# Altium PCB PCB1.PcbDoc
Units mm, origin at the board's own origin, x right, y up, seen from the top; angles counter-clockwise.
Board outline 26.8 x 45.34 mm, 2 copper layers (Top Layer, Bottom Layer), stack 1.569 mm thick; 32 components, 36 nets, 158 pads, 95 vias.
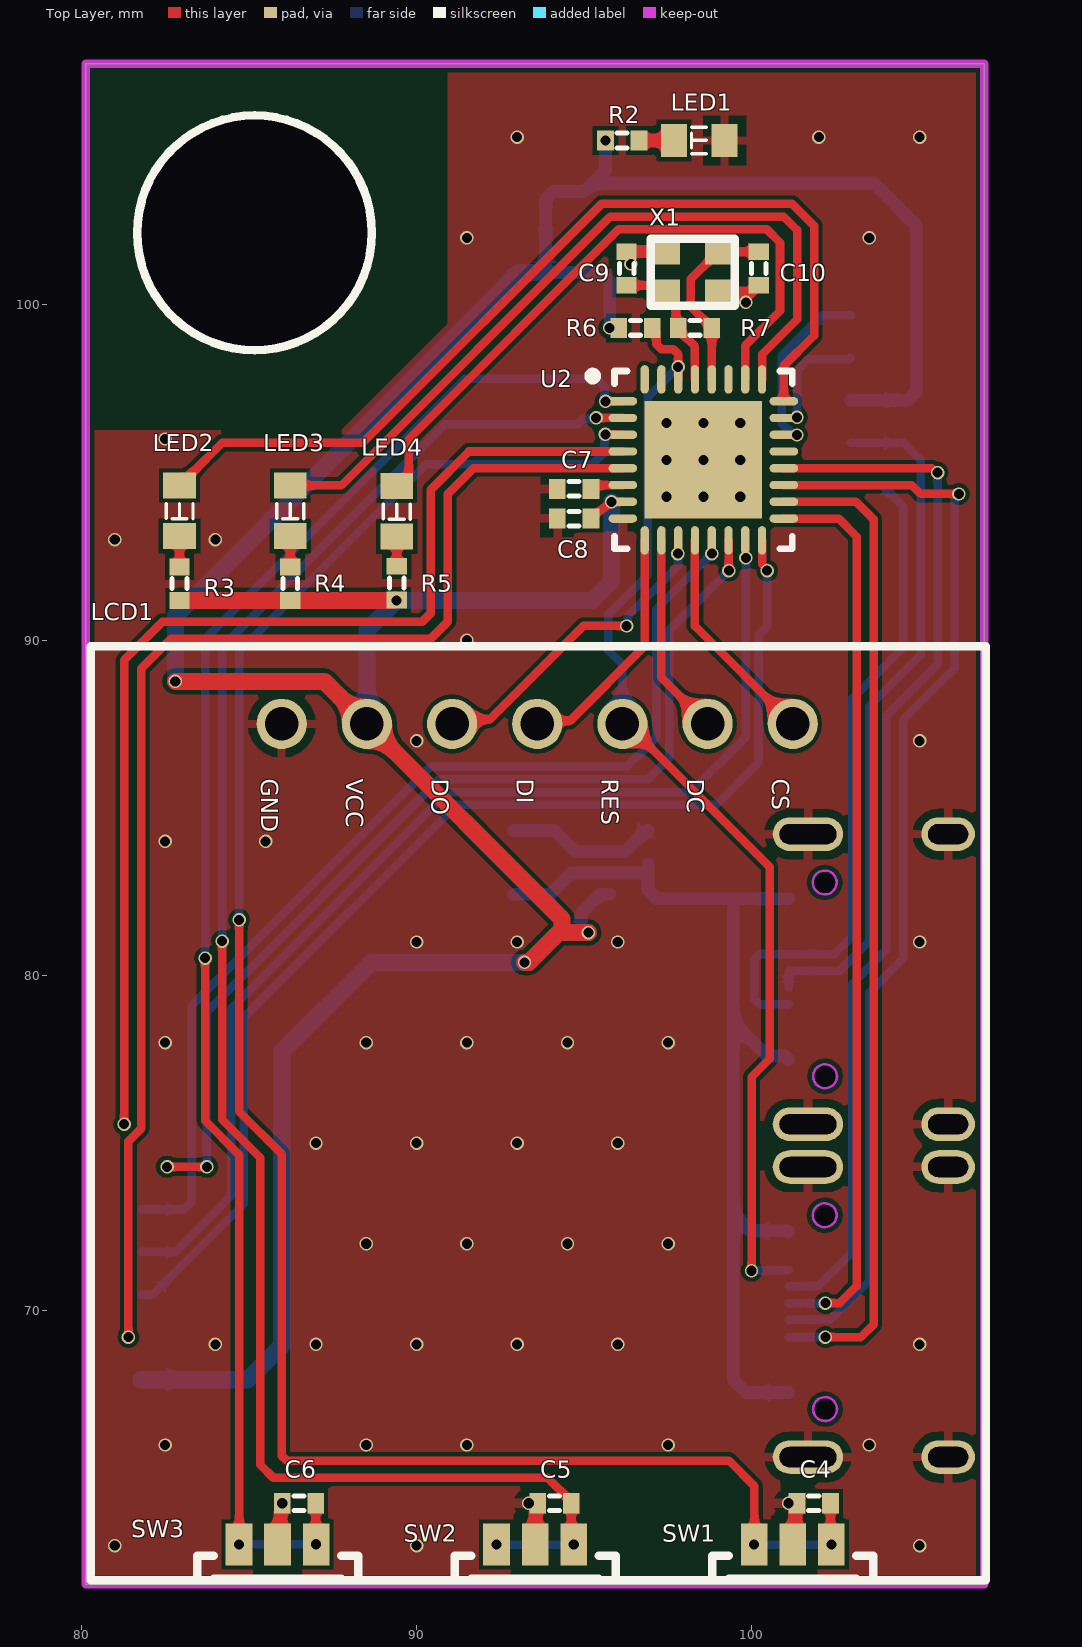
[diagram p0: Top Layer view]
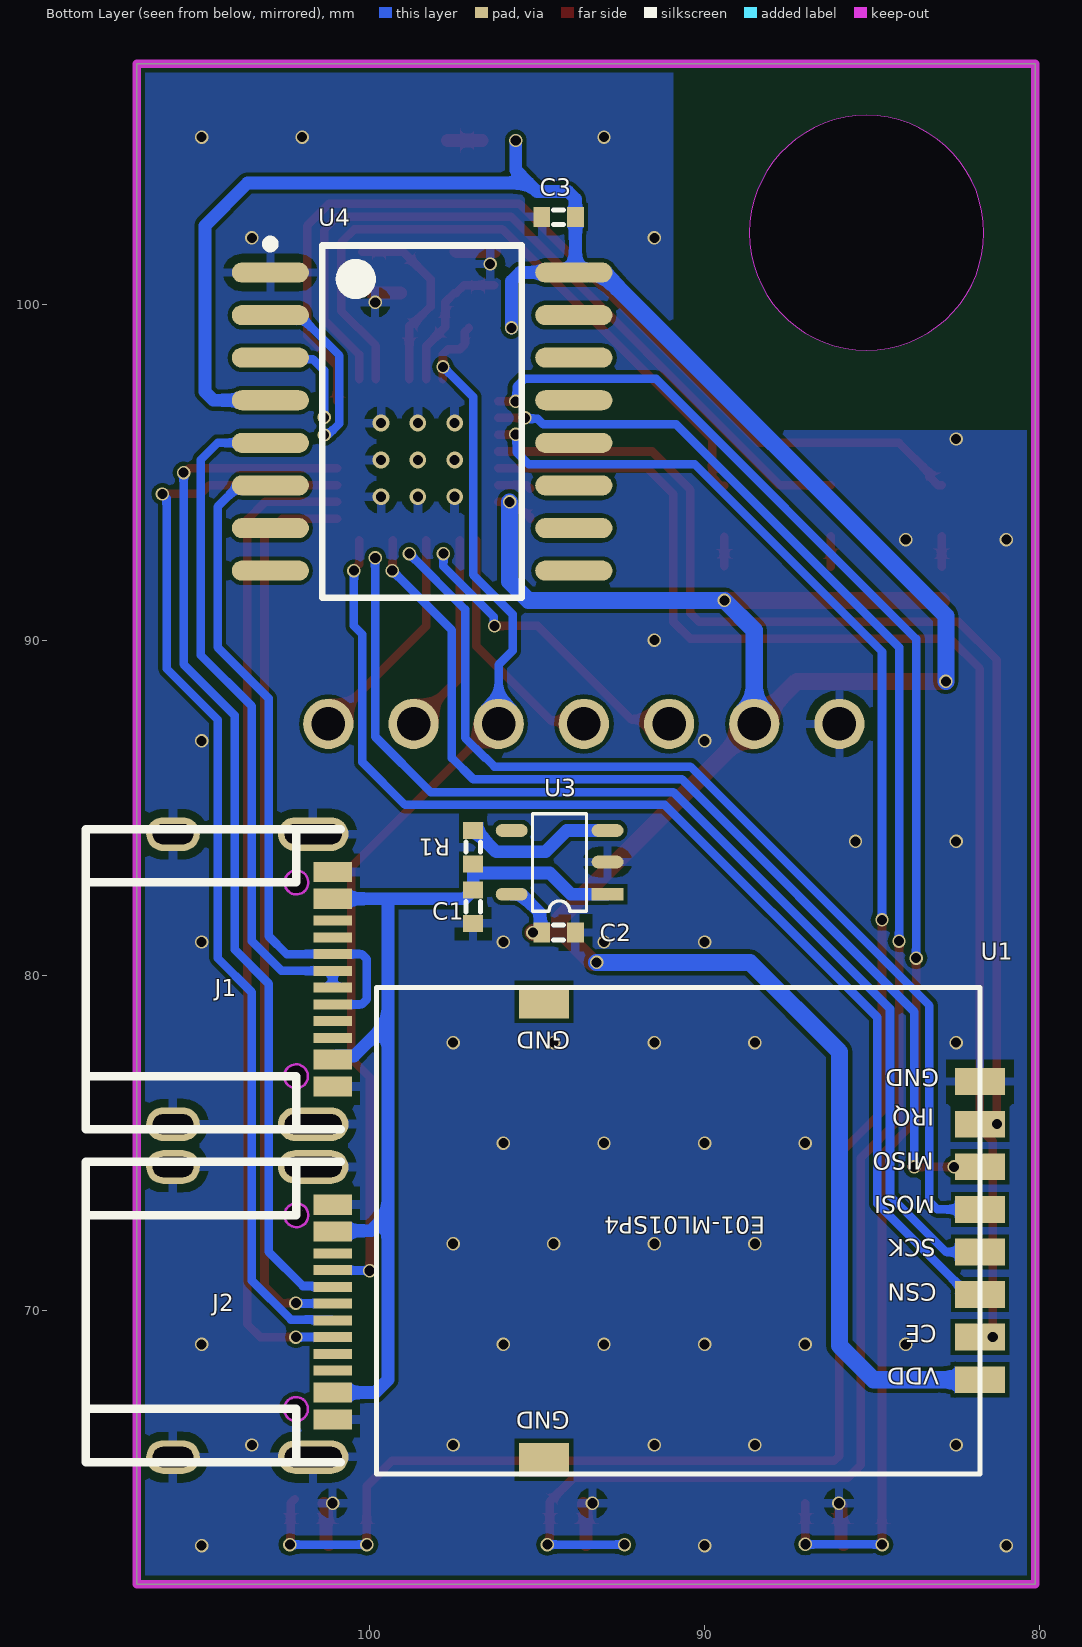
[diagram p1: Bottom Layer view, seen from below]
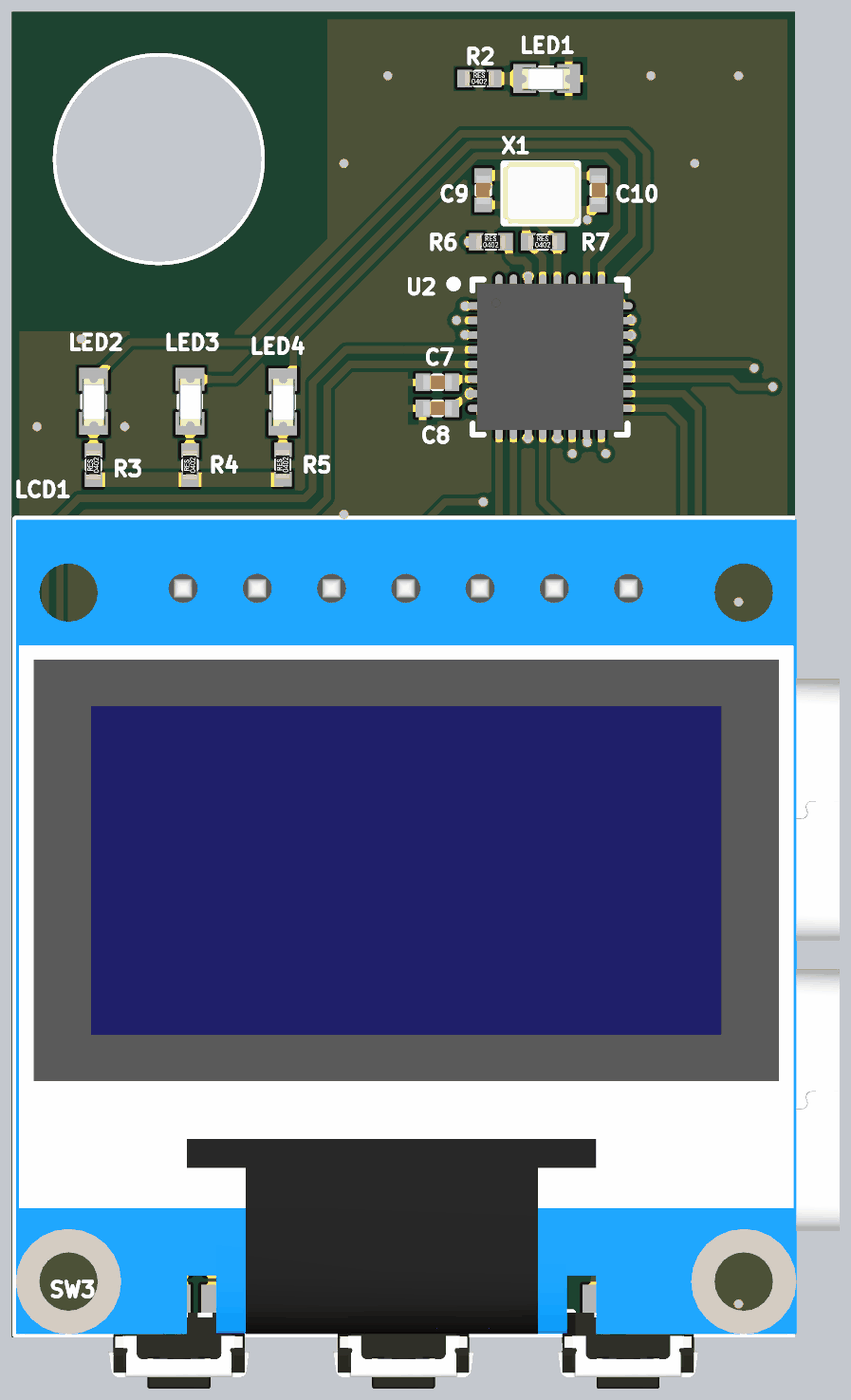
[diagram p2: 3D render of the assembled board from above, using the file's embedded part models]
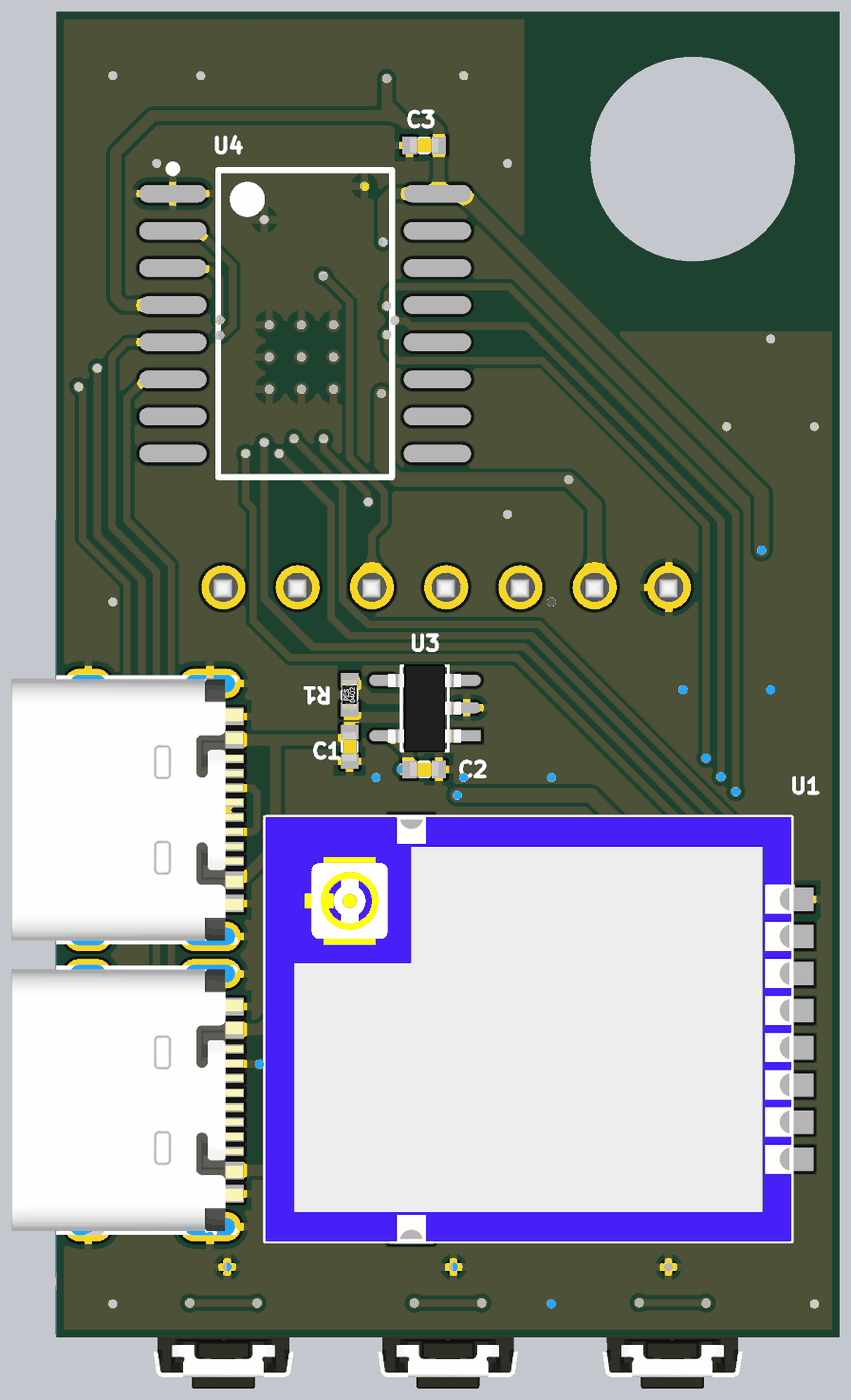
[diagram p3: 3D render of the assembled board from below, using the file's embedded part models]

## Layer stack, top to bottom
Top Solder: solder mask 0.0254, SM-001, Dk 4
Top Layer: signal copper 0.035
Dielectric 1: core 1.4986, Core-043, Dk 4.3
Bottom Layer: signal copper 0.035
Bottom Solder: solder mask 0.0254, SM-001, Dk 4

## Board outline
80.137,89.789 80.137,107.188 106.934,107.188 106.934,61.849 80.137,61.849
cut-out: 85.168,98.649 cw(c85.168,102.149) 81.668,102.149 cw(c85.168,102.149) 85.168,105.649 cw(c85.168,102.149) 88.668,102.149 cw(c85.168,102.149)

## Design rules (kind name [scope] priority, off if disabled: settings)
Clearance [All] p1: gap=0.127 ignorepadtopadclearanceinfootprint=FALSE
PolygonConnect [All] p1: connectstyle=Relief reliefconductorwidth=0.254 reliefentries=4 polygonreliefangle="90 Angle" airgapwidth=0.254
RoutingVias [All] p1: holewidth=0.711 width=1.27 viastyle="Through Hole" minholewidth=0.3 minwidth=0.4 maxholewidth=0.711 maxwidth=1.27
SolderMaskExpansion [All] p1: expansion=0.102 istentingtop=FALSE
Width [All] p1: maxlimit=0.508 minlimit=0.127 preferedwidth=0.254
30 further rules are at their usual default settings.

## Components (designator, comment, footprint, x,y, rotation, side; value= is the part's Value field where it differs from the comment)
C1 "Cap" CAP_0402 96.901,82.55 r270 bottom value=1uF
C2 "Cap" CAP_0402 94.853,81.28 r180 bottom value=1uF
C3 "Cap" CAP_0402 93.853,102.616 r0 bottom value=0.1uF
C4 "Cap" CAP_0402 102.346,64.262 r180 top value=0.1uF
C5 "Cap" CAP_0402 94.615,64.262 r180 top value=0.1uF
C6 "Cap" CAP_0402 86.995,64.262 r180 top value=0.1uF
C7 "Cap" CAP_0402 95.198,94.514 r180 top value=0.1uF
C8 "Cap" CAP_0402 95.198,93.625 r180 top value=0.1uF
C9 "Cap" CAP_0402 96.266,100.584 r90 top value=20pf
C10 "Cap" CAP_0402 100.203,101.584 r270 top value=20pf
J1 "USB TYPE C" USBC-SMD16F 105.852,84.215 r270 bottom
J2 "USB TYPE C" USBC-SMD16F 105.852,74.29 r270 bottom
LCD1 "LCD096" LCD096 85.979,87.503 r0 top
LED1 "R" SMD-0603_LED 97.677,104.902 r0 top
LED2 "R" SMD-0603_LED 82.931,93.105 r90 top
LED3 "R" SMD-0603_LED 86.233,93.105 r90 top
LED4 "R" SMD-0603_LED 89.408,93.091 r90 top
R1 "Res" RES_0402 96.901,83.328 r90 bottom value=10K
R2 "Res" RES_0402 95.631,104.902 r0 top value=1K
R3 "Res" RES_0402 82.931,91.186 r90 top value=1K
R4 "Res" RES_0402 86.233,91.186 r90 top value=1K
R5 "Res" RES_0402 89.408,91.202 r90 top value=1K
R6 "Res" RES_0402 96.028,99.314 r0 top value=10K
R7 "Res" RES_0402 97.806,99.314 r0 top value=1M
SW1 "SPST" ST01-111 102.369,63.028 r180 top
SW2 "SPST" ST01-111 94.688,63.028 r180 top
SW3 "SPST" ST01-111 87.007,63.028 r180 top
U1 "NRF24L01" NRF24L01P+PA+LNA+IPX 99.788,65.14 r90 bottom
U2 "NANO103ZD3AE" MCU_QFN_33_5x5 98.552,95.377 r0 top
U3 "AP2112K-3.3TRG1" SOT23-5 93.523,81.915 r0 bottom
U4 "CH340C" SOP-16 98.425,96.52 r180 bottom
X1 "Xtal" 2520S 99.059,100.35 r180 top value=12MHz

## Footprints (in the part's own frame and the unit in brackets; to place one, negate y for a bottom-side part, rotate by r counter-clockwise, add the part's x,y. Pads: shape width x height; smd on the part's side, far side on the other; paste and mask are expansions set on the pad)
2520S [mm]
  rect 0.9x0.8 smd: 1(0,-1.25) 2(1.65,0) ""(0,0) ""(1.65,-1.25)
  silkscreen extent -0.43,-1.63 2.07,0.37, body extent -0.49,-1.69 2.11,0.41, height 0.55
CAP_0402 [mm]
  rect 0.5x0.6 smd: 1(0,0) 2(1,0)
  silkscreen extent 0.35,-0.22 0.65,0.22, body extent 0,-0.25 1,0.25, height 0.48
LCD096 [mm]
  round 1.5 hole 1: 1(0,0) 2(2.54,0) 3(5.08,0) 4(7.62,0) 5(10.16,0) 6(12.7,0) 7(15.24,0)
  silkscreen extent -5.7,-25.54 21,2.32, body extent -5.7,-25.54 21,2.32, height 5.17
MCU_QFN_33_5x5 [mm]
  oval 0.85x0.25 smd: 1(-2.4,1.75) 2(-2.4,1.25) 3(-2.4,0.75) 4(-2.4,0.25) 5(-2.4,-0.25) 6(-2.4,-0.75) 7(-2.4,-1.25) 8(-2.4,-1.75) 17(2.4,-1.75) 18(2.4,-1.25) 19(2.4,-0.75) 20(2.4,-0.25) 21(2.4,0.25) 22(2.4,0.75) 23(2.4,1.25) 24(2.4,1.75)
  oval 0.25x0.85 smd: 9(-1.75,-2.4) 10(-1.25,-2.4) 11(-0.75,-2.4) 12(-0.25,-2.4) 13(0.25,-2.4) 14(0.75,-2.4) 15(1.25,-2.4) 16(1.75,-2.4) 25(1.75,2.4) 26(1.25,2.4) 27(0.75,2.4) 28(0.25,2.4) 29(-0.25,2.4) 30(-0.75,2.4) 31(-1.25,2.4) 32(-1.75,2.4)
  rect 3.5x3.5 smd: 33(0,0)
  silkscreen extent -3.42,-2.65 2.65,2.65, body extent -2.5,-2.5 2.5,2.5, height 0.9
NRF24L01P+PA+LNA+IPX [mm]
  rect 0.8x1.5 smd: 1(2.805,-18) 2(4.075,-18) 3(5.345,-18) 4(6.615,-18) 5(7.885,-18) 6(9.155,-18) 7(10.425,-18) 8(11.695,-18)
  rect 1x1.5 smd: 9(14.08,-5) 10(0.42,-5)
  silkscreen extent 0,-18 14.5,0, body extent 0,-18 14.5,0, height 2.6
RES_0402 [mm]
  rect 0.5x0.6 smd: 1(0,0) 2(1,0)
  silkscreen extent 0.35,-0.22 0.65,0.22, body extent 0,-0.25 1,0.25, height 0.35
SMD-0603_LED [mm]
  rect 0.78x0.98 smd: 1(0,0) 2(1.51,0)
  silkscreen extent 0.52,-0.4 0.97,0.4, body extent -0.08,-0.41 1.54,0.45, height 0.6
SOP-16 [mm] "SOP, 16-Leads, Body 10.30x3.81mm, Pitch 1.27mm, IPC Medium Density"
  oval 2.3x0.6 smd: 1(-4.525,4.445) 2(-4.525,3.175) 3(-4.525,1.905) 4(-4.525,0.635) 5(-4.525,-0.635) 6(-4.525,-1.905) 7(-4.525,-3.175) 8(-4.525,-4.445) 9(4.525,-4.445) 10(4.525,-3.175) 11(4.525,-1.905) 12(4.525,-0.635) 13(4.525,0.635) 14(4.525,1.905) 15(4.525,3.175) 16(4.525,4.445)
  silkscreen extent -4.65,-5.25 2.98,5.42, body extent -1.9,-5.25 1.9,5.25, height 2.65
SOT23-5 [mm]
  rect 0.95x0.38 smd: 1(-0.63,-0.51)
  oval 0.95x0.38 smd: 2(-0.63,-1.47) 3(-0.63,-2.41) 4(2.23,-2.41) 5(2.23,-0.51)
  silkscreen extent 0,-2.91 1.61,0, body extent -0.44,-2.95 2.06,0.05, height 1.09
ST01-111 [mm]
  rect 0.8x1.25 smd: 1(0,0) 1(2.3,0) 2(1.15,0)
  silkscreen extent -1.25,0.34 3.55,1.02, body extent -1.25,0.34 3.55,2.94, height 1.05
USBC-SMD16F [mm]
  rect 0.6x1.15 smd: 1(1.125,4.76) 2(1.925,4.76) 11(6.725,4.76) 12(7.525,4.76)
  rect 0.3x1.15 smd: 3(2.575,4.76) 4(3.075,4.76) 5(3.575,4.76) 6(4.075,4.76) 7(4.575,4.76) 8(5.075,4.76) 9(5.575,4.76) 10(6.075,4.76)
  oval 1x1.6 hole 0.6 slot 1.2 at 90 deg: ""(0,0) ""(8.65,0)
  oval 1x2.1 hole 0.6 slot 1.7 at 90 deg: ""(0,4.18) ""(8.65,4.18)
  Keep-Out Layer board cut-out: 1.44,3.324 1.304,3.351 1.189,3.429 1.111,3.544 1.084,3.68 1.084,3.68 1.111,3.816 1.189,3.931 1.304,4.009 1.44,4.036 1.44,4.036 1.576,4.009 1.691,3.931 1.769,3.816 1.796,3.68 1.796,3.68 1.769,3.544 1.691,3.429 1.576,3.351 1.44,3.324
  Keep-Out Layer board cut-out: 6.864,3.67 6.891,3.534 6.969,3.419 7.084,3.341 7.22,3.314 7.22,3.314 7.356,3.341 7.471,3.419 7.549,3.534 7.576,3.67 7.576,3.67 7.549,3.806 7.471,3.921 7.356,3.999 7.22,4.026 7.22,4.026 7.084,3.999 6.969,3.921 6.891,3.806 6.864,3.67
  Keep-Out Layer pour cut-out: 1.31,3.87
  Keep-Out Layer circle w0.076: c7.22,3.67 r0.356
  Keep-Out Layer circle w0.076: c1.44,3.68 r0.356
  silkscreen extent -0.15,-2.6 8.8,5, body extent -0.15,-2.6 8.8,5.3, height 3.16

## Part data
J1 J2: "USB Shielded I/O Receptacle; Type C; Right Angle; Surface Mount; Gold over Nickel", Case/Package=0101, Current Rating=5A, Flammability Rating="UL94 V-0", Insulation Color=Black, Manufacturer=Molex, Manufacturer Part Number=105450-0101, Max Operating Temperature=85°C, Min Operating Temperature=-30°C, Supplier Part Number 1=WM12856DKR-ND, Category=Connectors, ComponentLink1Description=http://www.farnell.com/datasheets/2801634.pdf?src-supplier=Farnell, ComponentLink1URL=http://www.farnell.com/datasheets/2801634.pdf?src-supplier=Farnell, ComponentLink2Description=http://www.farnell.com/datasheets/2672741.pdf?src-supplier=Newark, ComponentLink2URL=http://www.farnell.com/datasheets/2672741.pdf?src-supplier=Newark, ComponentLink3Description=http://www.farnell.com/datasheets/2015275.pdf?src-supplier=Element14, ComponentLink3URL=http://www.farnell.com/datasheets/2015275.pdf?src-supplier=Element14, ComponentLink4Description=https://www.molex.com/pdm_docs/ps/PS-105448-001.pdf?src-supplier=Digi-Key, ComponentLink4URL=https://www.molex.com/pdm_docs/ps/PS-105448-001.pdf?src-supplier=Digi-Key, ComponentLink5Description=http://www.farnell.com/datasheets/2801634.pdf?src-supplier=Newark, ComponentLink5URL=http://www.farnell.com/datasheets/2801634.pdf?src-supplier=Newark, ComponentLink6Description=https://www.molex.com/pdm_docs/sd/1054500101_sd.pdf?src-supplier=Digi-Key, ComponentLink6URL=https://www.molex.com/pdm_docs/sd/1054500101_sd.pdf?src-supplier=Digi-Key, ComponentLink7Description=http://www.farnell.com/datasheets/2801634.pdf?src-supplier=Element14, ComponentLink7URL=http://www.farnell.com/datasheets/2801634.pdf?src-supplier=Element14, ComponentLink8Description=http://www.literature.molex.com/SQLImages/kelmscott/Molex/PDF_Images/987651-4081.PDF?src-supplier=Avnet, ComponentLink8URL=http://www.literature.molex.com/SQLImages/kelmscott/Molex/PDF_Images/987651-4081.PDF?src-supplier=Avnet, ComponentLink9Description=http://www.literature.molex.com/SQLImages/kelmscott/Molex/PDF_Images/987651-4081.PDF?src-supplier=Avnet+Asia, ComponentLink9URL=http://www.literature.molex.com/SQLImages/kelmscott/Molex/PDF_Images/987651-4081.PDF?src-supplier=Avnet+Asia, Connector Type=USB, Contact Material="Copper Alloy", Contact Plating=Gold, Features=Shielded, Gender=Receptacle, Housing Material=Thermoplastic, Length=8.94mm, Mating Cycles=10000, Mount="Surface Mount,Through Hole,Horizontal", Number of Contacts=24, Number of Pins=24, Number of Ports=1, Number of Terminals=24, Orientation="Right Angle", Packaging="Tape and Reel", Pitch=0.5mm, Pricing 1="1=2.15000, 10=1.94900, 25=1.82960, 50=1.75000, 100=1.67050, 250=1.51140, 500=1.39208 (USD)", REACH SVHC=Unknown, RoHS=Yes, Shielding=Shielded, Stock 1=21711, Supplier 1=Digi-Key, Termination=Solder, USB Standard="USB 3.1"
LED1 LED2 LED3 LED4: library part LED
SW1 SW2 SW3: library part Switch_Button1
U1: library part NRF24L01_module
U3: "IC REG LINEAR 3.3V 600MA SOT23-5", Case/Package=SOT-23-5, Dropout Voltage=250mV, Manufacturer=Diodes, Max Input Voltage=6V, Max Operating Temperature=85°C, Max Output Current=600mA, Min Input Voltage=2.5V, Min Operating Temperature=-40°C, Output Voltage=3.3V, Package Quantity=1, Quiescent Current=55uA, Supplier Part Number 1=AP2112K-3.3TRG1DICT-ND, Accuracy=1.5%, Category="Voltage Regulators - Linear", ComponentLink1Description=https://datasheet.ciiva.com/29569/ap2112-29569919.pdf?src-supplier=Digi-Key, ComponentLink1URL=https://datasheet.ciiva.com/29569/ap2112-29569919.pdf?src-supplier=Digi-Key, ComponentLink2Description=https://datasheet.ciiva.com/30016/ap2112-30016792.pdf?src-supplier=Avnet, ComponentLink2URL=https://datasheet.ciiva.com/30016/ap2112-30016792.pdf?src-supplier=Avnet, ComponentLink3Description=https://datasheet.ciiva.com/29569/ap2112-29569917.pdf?src-supplier=Digi-Key, ComponentLink3URL=https://datasheet.ciiva.com/29569/ap2112-29569917.pdf?src-supplier=Digi-Key, ComponentLink4Description=https://datasheet.ciiva.com/29569/ap2112-29569918.pdf?src-supplier=Digi-Key, ComponentLink4URL=https://datasheet.ciiva.com/29569/ap2112-29569918.pdf?src-supplier=Digi-Key, Height=1.3mm, Lead Free="Lead Free", Length=3.1mm, Manufacturer Part Number=AP2112K-3.3TRG1, Mount="Surface Mount", Number of Outputs=1, Number of Pins=5, Number of Regulators=1, Output Current=600mA, Output Type=Fixed, Packaging="Tape and Reel", Polarity=Positive, Pricing 1="1=0.47000, 10=0.35500, 25=0.32000, 100=0.17450, 250=0.16872, 500=0.15126, 1000=0.11636 (USD)", RoHS=Yes, Stock 1=54786, Supplier 1=Digi-Key, Width=1.7mm
U2: OriginalSymbolOrigin=(0,0)

## Via types
v1: diameter 0.4, hole 0.3, Top Layer to Bottom Layer, tented both sides, 83 vias
v2: diameter 0.5, hole 0.3, Top Layer to Bottom Layer, tented both sides, 9 vias
v3: diameter 0.4, hole 0.3, Top Layer to Bottom Layer, 3 vias

## Nets (pads, with @x,y where several pads share a name; then routed paths per layer and width w, separated by ;. In a path a pad name is that pad's centre, name@x,y a point inside that pad or via, vN(x,y) a via of type N, cw(c..) or ccw(c..) an arc to the next point about the centre after c; other vN are vias at no path point)
5V: C1.1 J1.2 J1.11 J2.2 J2.11 R1.1 U3.1 | length 29.6
  Bottom Layer w0.381: U3.1 93.982,82.425 94.615,83.058 96.782,83.058 96.901,82.939 ; R1.1 96.901,82.939 ; J2.11 99.821,67.565 99.441,67.945 99.441,72.898 ; J2.2 101.067,72.39 99.949,72.39 99.441,72.898 ; J1.11 100.983,77.6 100.458,77.6 99.441,78.617 ; J1.2 99.568,82.29 ; 96.901,82.939 C1.1 97.161,82.29 99.568,82.29 ; 99.441,72.898 99.441,78.617 ; 99.441,78.617 99.441,82.163 99.568,82.29
D0: LED2.2 U2.24 | length 28.3
  Top Layer w0.254: LED2.2 83.031,94.615 83.294,94.878 83.294,94.978 84.201,95.885 88.392,95.885 95.523,103.016 101.2,103.016 101.854,102.362 101.854,99.086 100.952,98.184 U2.24
D1: LED3.2 U2.25 | length 23.5
  Top Layer w0.254: LED3.2 87.757,94.615 95.777,102.635 100.946,102.635 101.346,102.235 101.346,99.568 100.302,98.524 U2.25
D2: LED4.2 U2.26 | length 19.9
  Top Layer w0.254: LED4.2 89.508,94.601 89.771,94.864 89.771,95.998 96.027,102.254 100.442,102.254 100.838,101.858 100.838,99.822 99.802,98.786 U2.26
GND: C1.2 C2.2 C3.2 C4.2 C5.2 C6.2 C7.2 C8.2 C9.2 C10.2 J1. J1.1 J1.12 J2. J2.1 J2.12 LCD1.1 LED1.2 SW1.2 SW2.2 SW3.2 U1.8 U2.8 U2.33 U3.2 U4.1 X1. | length 6.2
  Top Layer w0.381: SW3.2 85.935,63.106 85.935,64.203 v3(85.995,64.262) ; SW2.2 93.538,64.135 93.615,64.212 C5.2 ; C9.2 96.274,101.592 97.401,101.592 X1.@97.409,101.6 ; X1.@99.059,100.35 99.919,100.35 100.153,100.584 C10.2 ; SW1.2 101.287,63.095 101.287,64.203 C4.2
  other v1: 81,63 90,63 105,63 82.5,66 88.5,66 91.5,66 97.5,66 103.5,66 84,69 87,69 90,69 93,69 96,69 105,69 88.5,72 91.5,72 94.5,72 97.5,72 87,75 90,75 93,75 96,75 82.5,78 88.5,78 91.5,78 94.5,78 97.5,78 90,81 93,81 96,81 105,81 82.5,84 85.5,84 90,87 105,87 91.5,90 81,93 84,93 82.5,96 99.822,100.076 96.393,101.219 91.5,102 103.5,102 93,105 102,105 105,105
  other v2: 97.452,94.277 98.552,94.277 99.652,94.277 97.452,95.377 98.552,95.377 99.652,95.377 97.452,96.477 98.552,96.477 99.652,96.477
  other v3: 93.345,64.262 101.092,64.262
ICE_CLK: J2.5 U2.20 | length 31.3
  Top Layer w0.254: U2.20 105.366,95.127 105.497,94.996 v1(105.537,94.996)
  Bottom Layer w0.254: J2.5 101.115,70.738 101.98,70.738 102.997,71.755 102.997,79.756 104.013,80.772 104.013,87.757 105.537,89.281 v1(105.537,94.996)
ICE_DAT: J2.7 U2.19 | length 32.8
  Top Layer w0.254: U2.19 104.763,94.627 105.029,94.361 v1(106.172,94.361)
  Bottom Layer w0.254: J2.7 101.115,69.738 102.339,69.738 103.505,70.904 103.505,79.502 104.521,80.518 104.521,87.63 106.045,89.154 106.045,94.234 v1(106.172,94.361)
IRQ: U1.7 U2.4 | length 33.4
  Top Layer w0.254: v1(81.276,75.569) 81.28,75.572 81.28,89.408 82.423,90.551 90.17,90.551 90.424,90.805 90.424,94.488 91.563,95.627 U2.4
KEY0: C4.1 SW1.1 U2.3 | length 58.9
  Top Layer w0.254: v1(84.709,81.661) 84.709,75.946 85.979,74.676 85.979,65.681 86.128,65.532 99.314,65.532 100.076,64.77 100.076,63.035 v1(100.069,63.028) ; v1(95.631,96.139) 95.641,96.129 96.15,96.129 U2.3 ; C4.1@102.223,64.385 C4.1 102.346,63.051 v1(102.369,63.028)
  Bottom Layer w0.254: v1(84.709,81.661) 84.709,89.662 90.297,95.25 95.25,95.25 95.603,95.603 95.603,96.111 v1(95.631,96.139) ; v1(100.069,63.028) v1(102.369,63.028)
KEY1: C5.1 SW2.1 U2.2 | length 53
  Top Layer w0.254: v1(84.201,81.026) 84.201,75.703 85.344,74.56 85.344,65.405 85.725,65.024 93.903,65.024 94.615,64.312 C5.1 94.615,63.101 v1(94.688,63.028) ; v1(95.354,96.631) 95.357,96.629 96.15,96.629 U2.2
  Bottom Layer w0.254: v1(84.201,81.026) 84.201,89.789 90.851,96.439 94.817,96.439 94.982,96.604 95.326,96.604 v1(95.354,96.631) ; v1(92.388,63.028) v1(94.688,63.028)
KEY2: C6.1 SW3.1 U2.1 | length 47.2
  Top Layer w0.254: v1(83.693,80.518) 83.693,75.672 84.709,74.656 84.709,63.03 v1(84.707,63.028) ; C6.1 v1(86.995,63.04) SW3.1@87.007,63.028 ; v1(95.636,97.12) 95.64,97.125 96.15,97.125 U2.1
  Bottom Layer w0.254: v1(83.693,80.518) 83.693,90.04 91.443,97.79 95.377,97.79 95.608,97.559 95.608,97.148 v1(95.636,97.12) ; v1(84.707,63.028) 84.713,63.034 86.989,63.034 v1(86.995,63.04)
LCD_DC: LCD1.6 U2.10 | length 6
  Top Layer w0.254: U2.10 97.302,88.88 LCD1.6
NetC7_1: C7.1 U2.6 | length 1
  Top Layer w0.254: C7.1 95.309,94.625 96.15,94.625 U2.6
NetJ1_5: J1.5 J1.8 U4.6 | length 20.8
  Bottom Layer w0.254: J1.8 100.225,79.14 100.076,79.289 100.076,80.491 100.225,80.64 J1.5 102.467,80.64 102.997,81.17 102.997,88.265 104.521,89.789 104.521,93.98 103.886,94.615 U4.6
NetJ1_6: J1.6 J1.7 U4.5 | length 20.6
  Bottom Layer w0.254: J1.7 J1.6 102.619,80.14 103.505,81.026 103.505,88.034 105.029,89.558 105.029,95.377 104.521,95.885 U4.5
NetLED1_1: LED1.1 R2.2 | length 1
  Top Layer w0.381: R2.2 LED1.1
NetLED2_1: LED2.1 R3.2 | length 0.9
  Top Layer w0.254: R3.2 LED2.1
NetLED3_1: LED3.1 R4.2 | length 0.9
  Top Layer w0.254: R4.2 LED3.1
NetLED4_1: LED4.1 R5.2 | length 0.9
  Top Layer w0.254: R5.2 LED4.1
NetR1_2: R1.2 U3.3 | length 4.5
  Bottom Layer w0.381: U3.3 94.11,84.325 94.742,83.693 96.216,83.693 96.851,84.328 R1.2
nRESET: J2.4 LCD1.5 R6.2 U2.30 | length 33.3
  Top Layer w0.254: LCD1.5 96.273,87.503 100.53,83.246 100.53,77.511 99.989,76.97 v1(99.989,71.196) ; R6.2 97.151,99.191 97.151,98.828 97.3,98.679 97.653,98.679 97.802,98.53 v1(97.802,98.154) U2.30
  Bottom Layer w0.254: LCD1.5 96.139,89.272 95.722,89.688 95.722,90.769 96.901,91.948 96.901,97.253 v1(97.802,98.154) ; v1(99.989,71.196) 99.999,71.205 101.082,71.205 J2.4
NRF_CE: U1.2 U2.5 | length 39.2
  Top Layer w0.254: v1(81.407,69.215) 81.407,75.057 81.788,75.438 81.788,89.154 82.677,90.043 90.424,90.043 90.932,90.551 90.932,94.361 91.698,95.127 U2.5
SPI0_MISO: U1.6 U2.14 | length 30
  Top Layer w0.254: v1(82.559,74.295) v1(83.747,74.295) ; U2.14 99.304,92.975 99.304,92.085 v1(99.314,92.075)
  Bottom Layer w0.254: v1(83.747,74.295) 83.747,78.921 90.678,85.852 96.901,85.852 97.536,86.487 97.536,90.297 98.044,90.805 v1(99.314,92.075)
SPI0_MOSI: U1.5 U2.13 | length 30.8
  Bottom Layer w0.254: U1.5 83.058,73.025 83.293,73.26 83.293,79.102 90.424,86.233 96.266,86.233 96.532,86.499 96.555,86.499 97.143,87.087 97.143,90.92 v1(98.806,92.583)
SPI0_SCLK: U1.4 U2.15 | length 33
  Bottom Layer w0.254: U1.4 82.804,71.755 84.47,73.421 84.47,79.009 90.932,85.471 98.171,85.471 99.822,87.122 v1(99.822,92.456)
SPI0_SS: U1.3 U2.16 | length 35
  Top Layer w0.254: U2.16 100.302,92.27 100.457,92.115 v1(100.457,92.075)
  Bottom Layer w0.254: U1.3 82.138,70.485 84.851,73.198 84.851,78.755 91.186,85.09 98.933,85.09 100.203,86.36 100.203,90.17 100.457,90.424 v1(100.457,92.075)
SPI1_MOSI: LCD1.4 U2.9 | length 7.3
  Top Layer w0.254: LCD1.4 93.692,87.596 94.581,87.596 96.802,89.817 U2.9
SPI1_SCLK: LCD1.3 U2.11 | length 9.2
  Top Layer w0.254: LCD1.3 91.197,87.641 92.19,87.641 94.973,90.424 v1(96.266,90.424)
  Bottom Layer w0.254: v1(96.266,90.424) 96.294,90.452 96.294,90.706 97.79,92.202 v1(97.79,92.583)
SPI1_SS: LCD1.7 U2.12 | length 6.7
  Top Layer w0.254: U2.12 98.302,90.42 LCD1.7
UART0_RX: J2.8 U2.18 | length 29.6
  Top Layer w0.254: U2.18 103.104,94.127 103.632,93.599 103.632,69.596 103.251,69.215 v1(102.189,69.215)
  Bottom Layer w0.254: J2.8 v1(102.189,69.215)
UART0_TX: J2.6 U2.17 | length 27
  Top Layer w0.254: U2.17 102.588,93.627 103.124,93.091 103.124,70.739 102.616,70.231 v1(102.189,70.231)
  Bottom Layer w0.254: J2.6 101.1,70.223 102.181,70.223 v1(102.189,70.231)
UART1_RX: U2.22 U4.2 | length 5.2
  Bottom Layer w0.254: v1(101.346,96.12) 101.231,96.12 100.892,96.459 100.892,98.487 102.1,99.695 U4.2
UART1_TX: U2.23 U4.3 | length 3.2
  Bottom Layer w0.254: v1(101.346,96.647) 101.346,98.044 101.686,98.384 102.909,98.384 U4.3
V33: C2.1 C3.1 C8.1 LCD1.2 R2.1 R3.1 R4.1 R5.1 R6.1 U1.1 U2.7 U3.5 U4.4 U4.16 | length 104.3
  Top Layer w0.254: R5.1 R5.1@89.416,91.194 ; C8.1 95.198,93.675 U2.7@95.825,94.108 ; v1(95.812,94.127) 95.812,94.121 U2.7@95.825,94.108 ; U2.7 95.853,94.127 U2.7@95.825,94.108
  Top Layer w0.381: R5.1@89.35,91.194 89.358,91.202 R5.1
  Top Layer w0.508: v1(82.804,88.773) 87.249,88.773 LCD1.2 94.33,81.692 94.33,81.376 ; R3.1 R4.1 89.342,91.186 R5.1@89.35,91.194 ; v1(93.218,80.391) 93.222,80.395 93.349,80.395 94.33,81.376 ; v1(95.123,81.28) 95.119,81.284 94.423,81.284 94.33,81.376
  Bottom Layer w0.381: C2.1 94.913,81.339 94.913,81.868 95.469,82.425 U3.5 ; v1(95.631,104.902) 95.631,104.013 95.25,103.632 ; v1(95.758,99.314) 95.758,100.711 95.504,100.965 U4.16 93.853,101.012 C3.1 93.853,103.155 94.076,103.378 94.996,103.378 95.25,103.632 ; U4.4 104.648,97.155 104.902,97.409 104.902,102.362 103.632,103.632 95.25,103.632
  Bottom Layer w0.508: U1.1 84.963,67.945 85.979,68.961 85.979,77.724 88.646,80.391 v1(93.218,80.391) ; v1(82.804,88.773) 82.804,90.719 93.05,100.965 U4.16 ; LCD1.2 88.519,90.297 v1(89.408,91.186) 95.25,91.186 95.812,91.748 v1(95.812,94.127)
X24MI: C10.1 R7.2 U2.28 X1.1 | length 5.7
  Top Layer w0.254: U2.28 98.802,98.073 98.806,98.077 98.806,99.364 98.683,99.487 98.633,99.487 98.171,99.949 98.171,100.762 99.009,101.6 X1.1 99.075,101.584 C10.1
X24MO: C9.1 R7.1 U2.29 X1.2 | length 4.2
  Top Layer w0.254: C9.1 97.175,100.584 X1.2 97.459,100.35 97.732,100.077 97.732,99.338 98.302,98.768 U2.29
pads on no net: J1.3 J1.4 J1.9 J1.10 J2.3 J2.9 J2.10 U1.9 U1.10 U2.21 U2.27 U2.31 U2.32 U3.4 U4.7 U4.8 U4.9 U4.10 U4.11 U4.12 U4.13 U4.14 U4.15

## Polygon pours and split planes (outlines as drawn)
GND on Top Layer "GND_L01_P018" (solid, remove dead copper, pour order 18): 80.137,61.849 106.934,61.849 106.934,107.188 80.137,107.188
GND on Top Layer "GND_L01_P005" (solid, pour order 5): 80.137,107.188
GND on Bottom Layer "GND_L02_P019" (solid, remove dead copper, pour order 19): 80.137,61.849 106.934,61.849 106.934,107.188 80.137,107.188

## Keep-outs
Keep-Out Layer:
  the board outline again, w0.254

## Other copper
Top Layer:
  pour cut-out: 80.137,107.188 90.932,107.188 90.932,99.441 87.757,96.266 80.137,96.266
Bottom Layer:
  pour cut-out: 80.137,107.188 90.932,107.188 90.932,99.441 87.757,96.266 80.137,96.266

## Silkscreen, mask and mechanical layers (free items; w line width, h text height)
Top Overlay:
  circle w0.254: c85.168,102.149 r3.5

## Text inside footprints (layer, text, board x,y; h text height)
LCD1: Top Overlay "GND" at 85.369,85.873 h0.51 r270; Top Overlay "VCC" at 87.909,85.873 h0.51 r270; Top Overlay "DO" at 90.449,85.873 h0.51 r270; Top Overlay "DI" at 92.989,85.873 h0.51 r270; Top Overlay "RES" at 95.529,85.873 h0.51 r270; Top Overlay "DC" at 98.069,85.873 h0.51 r270; Top Overlay "CS" at 100.609,85.873 h0.51 r270
U1: Bottom Overlay "GND" at 83.002,77.205 h0.51 r180; Bottom Overlay "IRQ" at 83.152,76.025 h0.51 r180; Bottom Overlay "MISO" at 83.172,74.715 h0.51 r180; Bottom Overlay "MOSI" at 83.122,73.415 h0.51 r180; Bottom Overlay "SCK" at 83.102,72.135 h0.51 r180; Bottom Overlay "CSN" at 83.082,70.815 h0.51 r180; Bottom Overlay "CE" at 83.082,69.565 h0.51 r180; Bottom Overlay "VDD" at 83.002,68.305 h0.51 r180; Bottom Overlay "GND" at 94.017,66.995 h0.51 r180; Bottom Overlay "GND" at 94.007,78.325 h0.51 r180; Bottom Overlay "E01-ML01SP4" at 88.187,72.811 h0.51 r180